# Altium PCB linkit-v4-0.3_6layers_kimonly.PcbDoc (part 4 of 5)
Units mm, origin at the board's own origin, x right, y up, seen from the top; angles counter-clockwise.
Board outline 70 x 35 mm, 6 copper layers (Top Layer, Int1 (GND), Int2 (Sign), Int3 (Sign), Int4 (PWR), Bottom Layer), stack 1.636 mm thick; 194 components, 149 nets, 738 pads, 717 vias.
Unrouted connection lines stored in the file: 1.
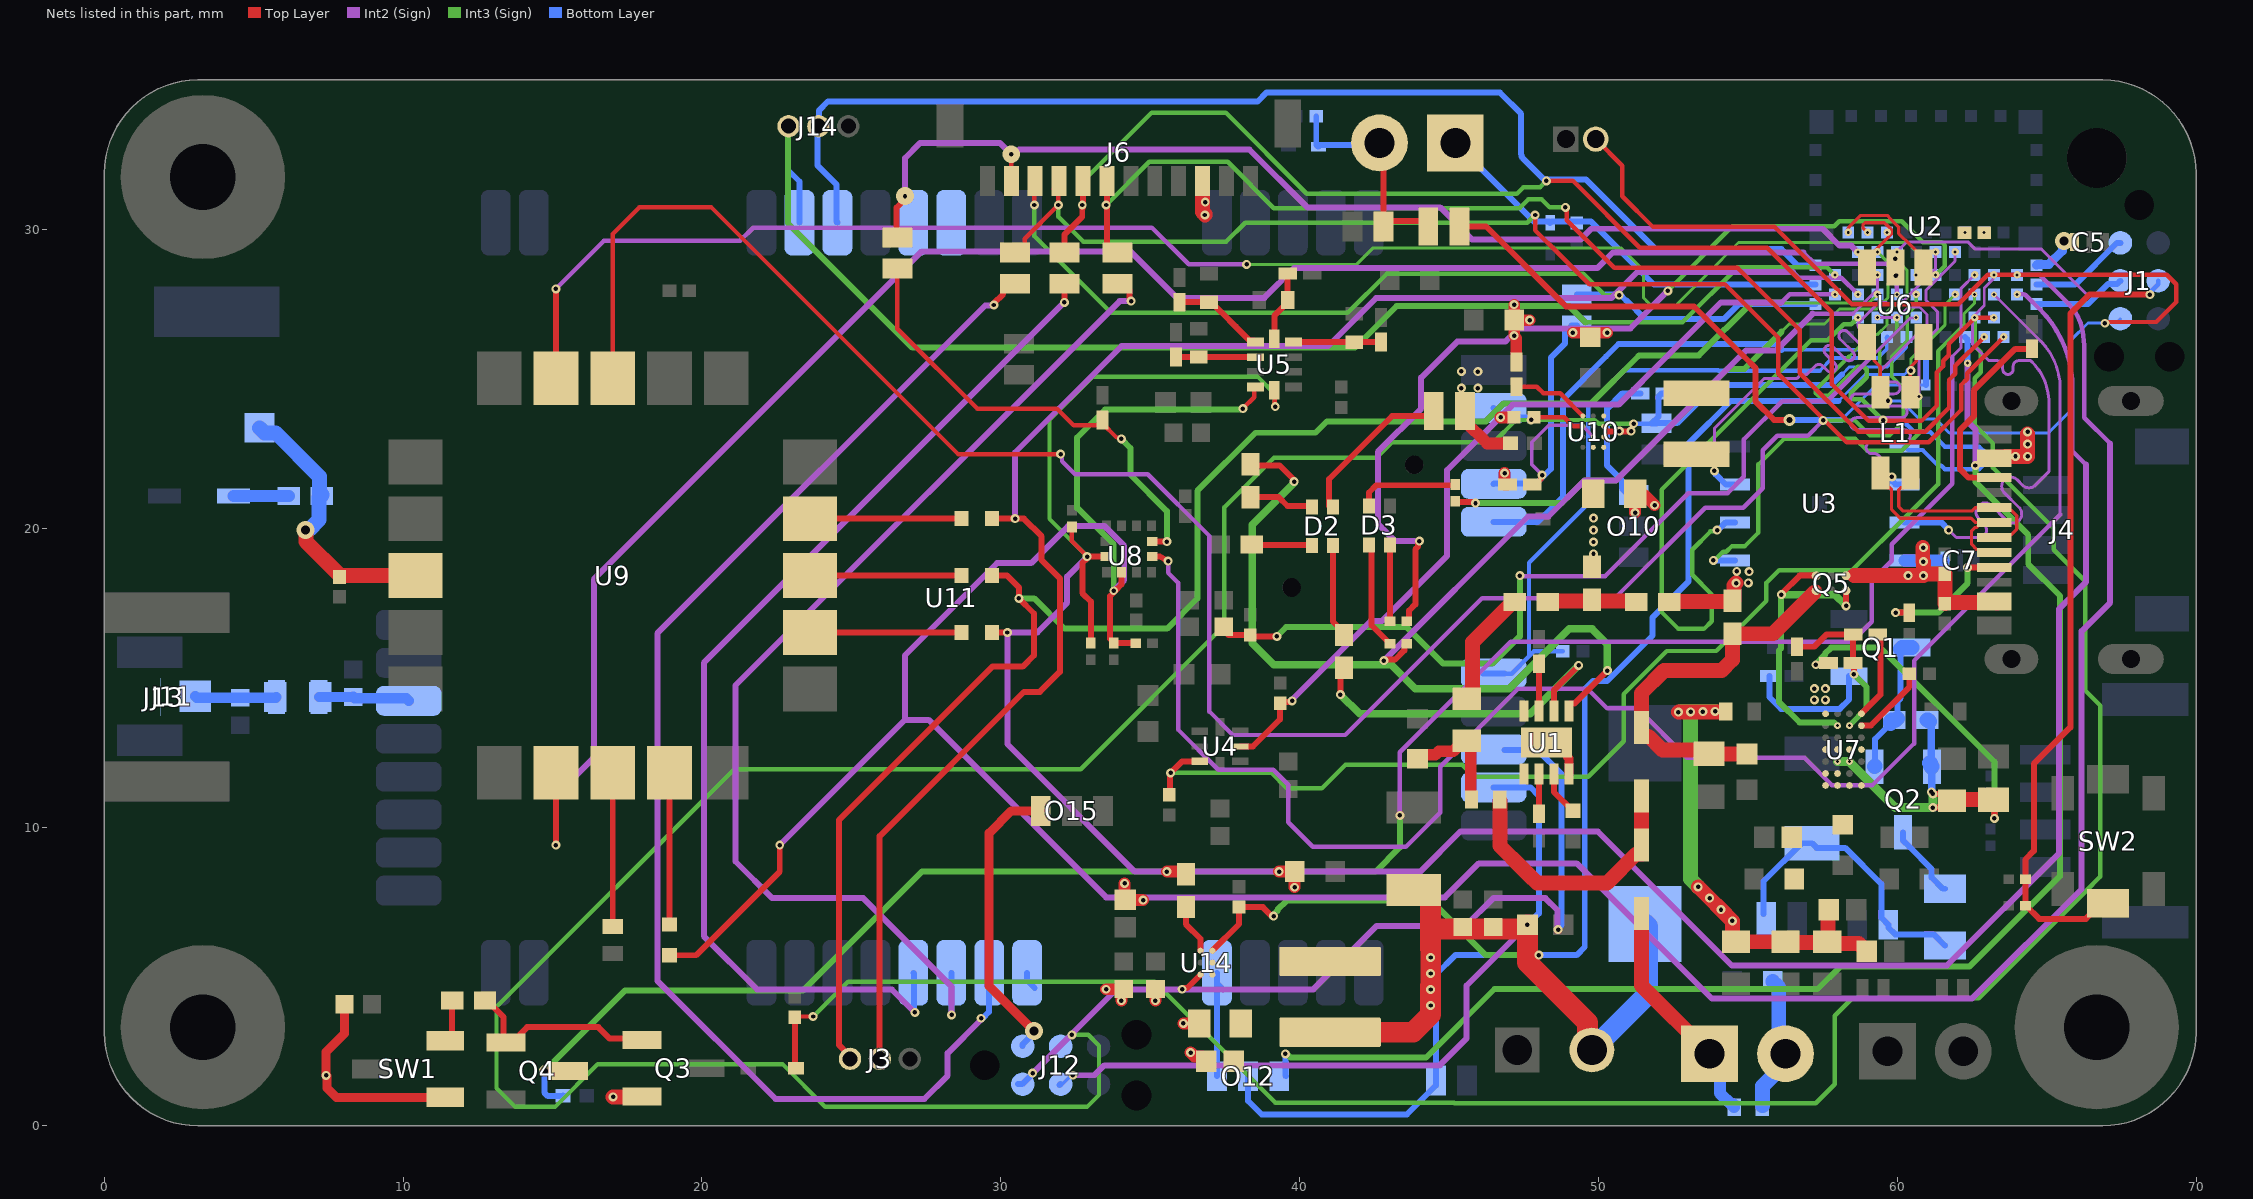
[diagram p7: the nets of this part, all layers, seen from the top]

## Via types
v1: diameter 0.3, hole 0.15, Int1 (GND) to Int3 (Sign), tented both sides, 165 vias
v2: diameter 0.3, hole 0.15, Top Layer to Int1 (GND), tented both sides, 113 vias
v3: diameter 0.3, hole 0.15, Top Layer to Int4 (PWR), tented both sides, 69 vias
v4: diameter 0.3, hole 0.15, Top Layer to Int3 (Sign), tented both sides, 64 vias
v5: diameter 0.3, hole 0.15, Int1 (GND) to Int2 (Sign), tented both sides, 39 vias
v6: diameter 0.6, hole 0.15, Int1 (GND) to Bottom Layer, tented both sides, 35 vias
v7: diameter 0.4/0.4/0.4/0.4 (per signal layer), hole 0.2, Top Layer to Bottom Layer, tented both sides, 31 vias
v8: diameter 0.3, hole 0.15, Int1 (GND) to Bottom Layer, tented both sides, 28 vias
v9: diameter 0.3, hole 0.15, Top Layer to Int2 (Sign), tented both sides, 21 vias
v10: diameter 0.3, hole 0.15, Int3 (Sign) to Bottom Layer, tented both sides, 20 vias
v11: diameter 0.3, hole 0.15, Int2 (Sign) to Int3 (Sign), tented both sides, 18 vias
v12: diameter 0.3, hole 0.15, Int4 (PWR) to Bottom Layer, tented both sides, 16 vias
v13: diameter 0.3, hole 0.15, Int2 (Sign) to Bottom Layer, tented both sides, 15 vias
v14: diameter 0.25, hole 0.1, Int3 (Sign) to Bottom Layer, tented both sides, 15 vias
v15: diameter 0.5, hole 0.2, Top Layer to Bottom Layer, tented both sides, 12 vias
v16: diameter 0.25, hole 0.1, Int2 (Sign) to Bottom Layer, tented both sides, 12 vias
v17: diameter 0.25, hole 0.1, Top Layer to Bottom Layer, tented both sides, 8 vias
v18: diameter 0.2, hole 0.1, Int2 (Sign) to Bottom Layer, tented both sides, 7 vias
v19: diameter 0.226, hole 0.1, Top Layer to Int3 (Sign), tented both sides, 6 vias
v20: diameter 0.4, hole 0.2, Top Layer to Bottom Layer, tented both sides, 6 vias
v21: diameter 0.6, hole 0.3, Top Layer to Bottom Layer, tented both sides, 4 vias
v22: diameter 0.25, hole 0.1, Int1 (GND) to Bottom Layer, tented both sides, 4 vias
v23: diameter 0.6, hole 0.15, Top Layer to Int2 (Sign), tented both sides, 2 vias
v24: diameter 0.6, hole 0.15, Int3 (Sign) to Bottom Layer, tented both sides, 2 vias
v25: diameter 0.3, hole 0.15, Top Layer to Bottom Layer, tented both sides, 2 vias
v26: diameter 0.6, hole 0.15, Int4 (PWR) to Bottom Layer, tented both sides, 1 vias
v27: diameter 0.25, hole 0.1, Int2 (Sign) to Int3 (Sign), tented both sides, 1 vias
v28: diameter 0.169, hole 0.1, Top Layer to Int2 (Sign), tented both sides, 1 vias

## Nets (pads, with @x,y where several pads share a name; then routed paths per layer and width w, separated by ;. In a path a pad name is that pad's centre, name@x,y a point inside that pad or via, vN(x,y) a via of type N, cw(c..) or ccw(c..) an arc to the next point about the centre after c; other vN are vias at no path point) (continued)
GPIO: J6.11 O16.1 U2.9 | length 37.7
  Top Layer w0.146: v23(30.353,32.512) J6.11@30.354,31.623 J6.11@30.354,31.623
  Top Layer w0.2: O16.1@26.543,29.731 26.514,29.76 26.514,30.724 26.797,31.007 v23(26.797,31.115)
  Int2 (Sign) w0.2: v23(26.797,31.115) 26.797,32.385 27.305,32.893 29.972,32.893 v23(30.353,32.512) 30.461,32.512 30.621,32.671 38.322,32.671 40.259,30.734 44.704,30.734 45.772,29.666 48.706,29.666 49.403,29.666 49.756,30.02 57.501,30.02 58.065,29.456 58.465,29.456 v16(58.681,29.24)
GPS_INT: U2.61 U9.19 | length 53.2
  Top Layer w0.2: U9.19@15.118,25.015 v9(15.118,28.01)
  Int2 (Sign) w0.15: v9(15.118,28.01) 16.724,29.617 21.279,29.617 21.716,30.055 35.062,30.055 36.287,28.829 v11(38.227,28.829)
  Int3 (Sign) w0.1: v11(38.227,28.829) 41.91,28.829 42.462,29.381 50.756,29.381 51.506,28.631 51.506,27.708 51.688,27.525 51.803,27.411 52.543,27.411 53.633,28.501 54.691,29.558 60.322,29.558 60.635,29.246 v18(60.635,28.474)
GPS_NRST: U2.53 U9.18 | length 69.5
  Top Layer w0.146: U9.18@17.018,25.015 17.018,29.845 17.907,30.734 20.32,30.734 28.575,22.479 v9(32.004,22.479)
  Int2 (Sign) w0.146: v9(32.004,22.479) 32.053,22.43 32.053,22.24 32.49,21.802 34.92,21.802 36.984,19.738 36.984,13.862 37.767,13.079 41.527,13.079 46.11,17.662 50.555,17.662 53.574,20.681 54.844,20.681 55.499,21.336 55.499,22.606 55.988,23.095 57.009,23.095 v11(57.519,23.605)
  Int3 (Sign) w0.12: v11(57.519,23.605) 57.946,23.605 58.585,23.605 59.103,23.087 59.724,23.087 60.208,23.571 60.208,24.684 59.817,25.075 59.817,25.745 59.817,25.754 60.332,26.269 60.332,27.167 60.635,27.47 v14(60.635,27.824)
GPS_PPS: U2.54 U9.7 | length 62.2
  Top Layer w0.2: v9(15.113,9.398) 15.113,11.81 U9.7@15.118,11.815
  Int2 (Sign) w0.15: 56.858,29.228 57.24,28.846 59.645,28.846 59.985,28.507 v18(59.985,27.824)
  Int2 (Sign) w0.2: v9(15.113,9.398) 15.113,11.049 16.383,12.319 16.383,18.288 27.361,29.266 34.334,29.266 35.893,27.706 38.821,27.706 39.815,28.701 48.706,28.701 49.962,28.701 50.489,29.228 56.858,29.228
GPS_PWR_EN: R21.2 U2.50 U4.7 | length 40.5
  Top Layer w0.2: R21.2@35.643,11.083 35.665,11.105 35.665,11.789 v4(35.687,11.811) 36.072,12.196 36.659,12.196 U4.7@36.663,12.2
  Int3 (Sign) w0.1: 62.235,26.798 62.235,27.175 62.585,27.525 v18(62.585,27.824)
  Int3 (Sign) w0.15: v4(35.687,11.811) 39.068,11.811 39.576,11.303 40.75,11.303 41.537,12.09 45.441,12.09 45.847,11.684 49.657,11.684 50.846,12.873 50.846,14.45 52.287,15.891 53.942,15.891 55.624,17.573 55.624,18.173 56.05,18.599 58.494,18.599 60.346,20.451 61.364,21.47 61.364,25.745 61.364,25.927 62.235,26.798
GPS_UART_RX: J3.2 R40.2 U2.56 | length 55.7
  Top Layer w0.2: J3.2@25.892,2.286 25.951,2.345 25.951,9.695 30.779,14.523 31.309,14.523 31.978,15.191 31.978,18.323 31.369,18.932 31.369,19.727 30.776,20.32 R40.2@29.713,20.32
  Int2 (Sign) w0.15: 56.515,28.575 56.708,28.382 58.127,28.382 v16(58.685,27.824)
  Int2 (Sign) w0.2: v9(30.48,20.32) 30.48,22.533 34.042,26.094 40.953,26.094 42.557,27.698 50.431,27.698 51.308,28.575 56.515,28.575
GPS_UART_TX: J3.3 R42.2 U2.55 | length 56.3
  Top Layer w0.2: J3.3@24.892,2.286 24.892,2.403 24.592,2.703 24.592,10.241 29.718,15.367 30.734,15.367 31.115,15.748 31.115,17.145 v4(30.607,17.653) 30.607,18.022 30.214,18.415 R42.2@29.713,18.415
  Int3 (Sign) w0.1: 56.139,27.543 59.055,27.543 v14(59.335,27.824)
  Int3 (Sign) w0.2: v4(30.607,17.653) 31.117,17.653 32.133,16.637 35.569,16.637 36.58,17.648 36.58,21.25 38.524,23.194 40.535,23.194 40.917,23.576 46.232,23.576 46.832,24.176 49.755,24.176 51.323,25.745 51.36,25.781 53.363,25.781 55.131,27.549 56.134,27.549
I2C_SCL: R1.1 R43.2 R54.1 U2.29 U5.10 U8.12 | length 88.8
  Top Layer w0.15: R54.1@32.385,20.04 32.385,19.558 v4(32.893,19.05) ; U8.12@33.513,19.052 U8.12@33.515,19.054 ; U5.10@39.159,24.618 39.173,24.604 39.173,24.083 v4(39.187,24.069)
  Top Layer w0.2: R43.2@29.713,16.515 29.716,16.512 30.224,16.512 v9(30.226,16.51) ; v4(32.893,19.05) 32.893,18.996 32.734,18.836 32.734,17.828 33.02,17.542 R1.1@33.02,16.155 ; v4@32.895,19.052 U8.12@33.513,19.052
  Int2 (Sign) w0.15: v16(64.01,27.824) 64.21,27.824 cw(c64.21,27.674) 64.316,27.78 64.793,27.302 ; 64.794,27.302 cw(c62.201,24.727) 65.831,25.146 cw(c62.201,24.727) 65.855,24.728 65.855,24.727 65.855,22.583 66.313,22.125
  Int2 (Sign) w0.2: v4(32.893,19.05) 32.223,18.38 32.223,17.509 31.224,16.51 v9(30.226,16.51) 30.226,12.772 34.489,8.509 44.041,8.509 45.381,9.849 49.98,9.849 54.463,5.367 61.661,5.367 65.416,9.122 65.416,17.298 66.313,18.196 66.313,22.125
  Int3 (Sign) w0.15: v4(32.893,19.05) 31.633,20.31 31.633,23.632 33.075,25.074 38.592,25.074 39.172,24.494 39.172,24.085 v4(39.187,24.069)
I2C_SDA: R2.1 R44.1 R56.1 U2.27 U5.9 U8.2 | length 109
  Top Layer w0.15: v4(38.1,24.003) 38.481,24.384 38.481,24.653 38.521,24.693 U5.9@38.521,24.728
  Top Layer w0.2: R44.1@18.918,5.71 19.807,5.71 22.606,8.509 v9(22.606,9.398) ; U8.2@34.04,18.529 34.04,18.117 33.83,17.907 v4(33.782,17.907) 33.782,17.853 33.656,17.727 33.656,16.735 33.656,16.301 33.782,16.175 R2.1@33.782,16.155 34.492,16.155 R56.1@34.518,16.129
  Int2 (Sign) w0.15: v16(64.01,28.474) 64.77,28.474 65.709,27.535 cw(c64.43,26.257) 66.238,26.257 cw(c63.719,25.933) 66.258,25.992 cw(c66.108,25.989) 66.258,25.989 66.259,25.78 66.259,25.146 66.259,23.7 67.123,22.836
  Int2 (Sign) w0.2: v9(22.606,9.398) 26.797,13.589 ; v4(33.782,17.907) 33.782,17.91 34.134,18.262 34.134,19.408 33.475,20.066 32.258,20.066 31.02,18.828 29.877,18.828 26.797,15.748 26.797,13.589 ; 67.123,22.836 67.123,17.509 66.167,16.553 66.167,12.625 66.167,7.926 62.497,4.256 53.8,4.256 49.27,8.786 45.997,8.786 44.86,7.649 33.529,7.649 27.589,13.589 26.797,13.589
  Int3 (Sign) w0.2: v4(33.782,17.907) 33.782,19.461 32.56,20.683 32.56,23.035 33.496,23.971 38.068,23.971 v4(38.1,24.003)
IMU_PWR: R18.2 R31.1 U2.41 | length 30.8
  Top Layer w0.1: R18.2@38.354,16.424 R18.2@38.395,16.383
  Top Layer w0.2: R31.1@37.465,16.695 37.41,16.64 37.627,16.424 R18.2@38.354,16.424 ; R18.2@38.395,16.383 v4(39.243,16.383)
  Int2 (Sign) w0.1: 59.149,25.745 60.444,27.039 60.625,27.039 v18(60.635,27.049)
  Int2 (Sign) w0.15: v11(47.371,18.415) 47.395,18.391 50.223,18.391 53.005,21.174 54.321,21.174 54.864,21.717 54.864,22.97 56.147,24.253 57.657,24.253 59.149,25.745
  Int3 (Sign) w0.2: v4(39.243,16.383) 39.547,16.687 43.588,16.687 44.806,15.469 46.457,15.469 47.371,16.383 v11(47.371,18.415)
INT1_IMU: U2.49 U8.5 | length 56.2
  Top Layer w0.2: U8.5@35.065,19.054 35.321,19.054 v9(35.599,18.901)
  Int2 (Sign) w0.1: v18(63.235,27.824) 64.797,26.262 cw(c63.22,24.684) 65.403,25.146 cw(c63.22,24.684) 65.451,24.684 65.451,24.682 65.451,20.458
  Int2 (Sign) w0.15: v9(35.599,18.901) 35.599,18.505 35.934,18.17 35.934,13.263 37.282,11.915 39.121,11.915 39.624,11.412 39.624,10.16 40.443,9.341 43.561,9.341 44.704,10.484 44.704,12.023 47.301,14.62 49.639,14.62 50.289,13.97 51.308,13.97 52.959,12.319 56.896,12.319 57.811,11.404 59.17,11.404 60.561,12.795 60.561,15.568 65.451,20.458
INT2_IMU: O16.2 R63.1 U8.6 | length 15.9
  Top Layer w0.15: O16.2@26.543,28.689 26.543,26.67 29.21,24.003 31.877,24.003 32.443,23.437 33.276,23.437 33.401,23.562 R63.1@33.401,23.622 33.401,23.509 33.876,23.035 33.988,23.035 v4(34.036,22.987)
  Top Layer w0.2: U8.6@35.065,19.554 v4(35.56,19.554)
  Int3 (Sign) w0.2: v4(34.036,22.987) 34.342,22.681 34.342,21.789 35.56,20.571 v4(35.56,19.554)
KIM_I2C_SCL: U11.41@28.345,30.224
KIM_I2C_SDA: U11.40@27.075,30.224
KIM_PWR_ON: O12.3 U2.36 | length 48.6
  Int2 (Sign) w0.2: v16(62.357,25.527) 62.357,23.564 62.611,23.31 v11(62.611,22.098)
  Int3 (Sign) w0.2: v10(39.522,2.413) 39.577,2.413 39.704,2.286 44.229,2.286 46.523,4.579 57.335,4.579 58.086,5.33 62.41,5.33 65.448,8.367 65.448,17.73 64.383,18.795 64.383,19.779 62.611,21.551 v11(62.611,22.098)
  Bottom Layer w0.2: v10(39.522,2.413) 39.522,1.681 O12.3@39.542,1.662 ; U2.36@62.26,26.399 62.357,26.302 v16(62.357,25.527)
KIM_RX: O4.1 U11.19@27.075,5.124 | length 36.3
  Top Layer w0.2: v9(32.131,27.559) O4.1@32.131,28.181
  Int2 (Sign) w0.2: v13(27.125,3.795) 26.356,4.564 21.852,4.564 20.066,6.35 20.066,15.494 v9(32.131,27.559)
  Bottom Layer w0.2: U11.19@27.075,5.124 27.1,5.099 27.1,3.82 v13(27.125,3.795)
KIM_TX: O3.1 U11.18@28.345,5.124 | length 36.7
  Top Layer w0.2: O3.1@33.909,28.181 34.079,28.181 34.309,27.951 34.309,27.705 34.363,27.651 v9(34.363,27.597)
  Int2 (Sign) w0.2: v13@28.359,3.718 28.359,4.661 25.4,7.62 22.352,7.62 21.126,8.846 21.126,14.741 33.982,27.597 v9(34.363,27.597)
  Bottom Layer w0.2: U11.18@28.345,5.124 28.352,5.117 28.352,3.724 v13(28.359,3.717)
LED_B: R24.1 U2.63 | length 23.2
  Top Layer w0.2: v9(42.82,15.569) 42.858,15.607 43.199,15.607 43.507,15.915 43.507,16.069 43.567,16.129 R24.1@43.587,16.129
  Int2 (Sign) w0.1: 58.516,27.178 59.335,27.997 v16(59.335,28.474)
  Int2 (Sign) w0.15: 57.17,27.178 58.516,27.178
  Int2 (Sign) w0.2: v9(42.82,15.569) 47.642,20.391 48.331,20.391 49.53,21.59 50.58,21.59 54.735,25.745 54.943,25.953 55.945,25.953 57.17,27.178
LED_G: R25.1 U2.60 | length 31.1
  Top Layer w0.2: R25.1@43.587,16.891 43.607,16.891 43.667,16.951 43.667,17.244 43.874,17.451 43.874,19.293 43.969,19.389 43.969,19.527 v9(44.008,19.565)
  Int2 (Sign) w0.2: v9(44.008,19.565) 43.203,19.565 42.622,20.146 42.622,22.556 44.069,24.003 44.069,25.036 45.276,26.243 46.885,26.243 47.026,26.384 47.026,26.388 47.327,26.689 48.706,26.689 51.073,26.689 v11(52.324,27.94)
  Int3 (Sign) w0.15: v11(52.324,27.94) 54.483,30.099 57.892,30.099 58.062,30.27 60.154,30.27 60.85,29.574 61.485,29.574 61.585,29.474 61.585,28.774 v14(61.285,28.474)
LED_R: R23.1 U2.62 | length 18.2
  Top Layer w0.2: R23.1@45.212,20.903 45.242,20.873 45.857,20.873 v4(45.887,20.842)
  Int3 (Sign) w0.1: 56.134,26.579 56.384,26.829 57.563,26.829 58.071,27.337 59.315,27.337 59.692,27.713 59.692,28.181 v14(59.985,28.474)
  Int3 (Sign) w0.2: v4(45.887,20.842) 48.782,20.842 49.539,21.599 50.59,21.599 54.325,25.334 54.889,25.334 56.134,26.579
LX1: L2.1 U10.A1
LX2: L2.2 U10.D1
NetBT1_+: BT1.+ C40.2 R41.1 U9.3 | length 9.3
  Top Layer w0.5: v21(6.731,19.939) 6.75,19.92 6.75,19.558 C40.2@7.874,18.434 ; C40.2@7.925,18.415 U9.3@10.418,18.415
  Bottom Layer w0.5: BT1.+@5.195,23.36 5.364,23.191 5.742,23.191 7.201,21.732 7.201,21.124 7.207,21.119 R41.1@7.286,21.119 ; v21(6.731,19.939) 6.75,19.958 6.867,19.958 7.191,20.282 7.191,21.024 7.241,21.074 R41.1@7.279,21.074
NetC2_2: C2.2 R53.1 U1.8 | length 4
  Top Layer w0.4: R53.1@47.127,17.526 R53.1@47.202,17.526
  Top Layer w0.5: C2.2@45.593,14.289 45.668,14.289 45.793,14.414 45.793,16.192 R53.1@47.127,17.526
NetC5_2: C5.2 U2.26 | length 1.4
  Bottom Layer w0.3: U2.26@64.66,28.799 64.685,28.824 65.071,28.824 65.529,29.282 65.529,29.546 v21(65.586,29.603)
NetC7_2: C7.2 U3.8 | length 1.4
  Bottom Layer w0.302: C7.2@61.554,18.923 C7.2@61.603,18.923
  Bottom Layer w0.4: U3.8@60.244,18.923 60.544,18.923 C7.2@61.554,18.923
NetC14_1: C14.1 R27.2 U5.4 | length 2.9
  Top Layer w0.2: U5.4@39.797,26.228 C14.1@41.829,26.228 R27.2@42.718,26.228
NetC15_1: C15.1 R30.2 U5.5 | length 2.5
  Top Layer w0.2: U5.5@39.159,26.338 39.159,27.113 39.604,27.558 C15.1@39.604,27.633 39.604,28.422 39.539,28.422 R30.2@39.639,28.522
NetC16_1: C16.1 R32.2 U5.6 | length 3.1
  Top Layer w0.2: R32.2@35.987,27.563 C16.1@36.967,27.563 37.042,27.563 37.395,27.21 37.403,27.21 37.868,26.744 38.334,26.278 38.471,26.278 U5.6@38.521,26.228
NetC23_1: C23.1 C24.2 C25.1 C28.2 C29.1 C32.2 C33.2 C43.2 U7.B3 U7.B4 | length 16.6
  Top Layer w0.4: v4(53.905,13.872) 54.252,13.872 C25.1@54.262,13.862
  Top Layer w0.5: v4(52.676,13.845) 54.187,13.845 C25.1@54.213,13.871 ; v4(53.34,8.001) v4(53.721,7.62) v4(54.102,7.239) v4(54.483,6.858) 54.483,6.447 54.517,6.413 54.517,6.159 54.519,6.161 C43.2@54.61,6.161 C24.2@56.261,6.161 C24.2@56.356,6.161 ; C24.2@56.38,6.137 C28.2@57.301,6.137 ; C28.2@57.682,6.161 57.682,7.128 57.706,7.152 C32.2@57.706,7.239 ; C28.2@57.741,6.107 58.711,6.107 58.866,5.952 58.881,5.952 58.976,5.857 C33.2@58.976,5.842
  Int3 (Sign) w0.5: v4@52.772,13.872 v4@53.104,13.872 ; v4(53.34,8.001) 53.086,8.255 v4(53.086,13.854) v4@53.104,13.872 ; v4(53.905,13.872) v4@53.104,13.872
  other v4: 53.496,13.863
NetC30_1: C30.1 C31.1 R36.1 U7.C2 U7.C3 | length 18
  Top Layer w0.2: v4(57.276,15.431) 57.295,15.45 57.653,15.45 R36.1@57.697,15.494 ; v4(61.195,10.653) 61.597,10.653 C31.1@61.86,10.916 ; v4(61.195,11.112) 61.604,11.112 C31.1@61.83,10.886 ; v4(63.246,10.287) C30.1@63.246,10.897
  Top Layer w0.5: C31.1@61.86,10.916 C30.1@63.227,10.916 C30.1@63.246,10.897
  Int3 (Sign) w0.2: v4(57.276,15.431) 57.276,15.458 57.578,15.76 57.578,15.795 57.785,16.002 59.436,16.002 63.246,12.192 v4(63.246,10.287)
  Int3 (Sign) w0.3: v19(58.001,12.192) v19(58.401,12.192) 59.94,10.653 v4(61.195,10.653) v4(61.195,11.112)
NetC49_2: C49.2 J11.3 J13.1 L3.1@5.762,14.351 L3.2@5.727,14.351 | length 2.7
  Bottom Layer w0.347: J11.3@3.049,14.377 3.1,14.326 C49.2@4.555,14.326 5.737,14.326 L3.1@5.762,14.351
NetC57_1: C57.1 R51.2 U5.7 | length 2.8
  Top Layer w0.2: R51.2@35.864,25.728 C57.1@36.626,25.728 U5.7@38.521,25.728 U5.7@38.519,25.73 ; C57.1@36.626,25.827 C57.1@36.723,25.73
NetC58_1: C58.1 D5.1 D6.1 U1.1 | length 9.1
  Top Layer w0.5: C58.1@46.703,10.872 46.703,9.374 47.462,8.615 47.462,8.61 47.813,8.259 47.818,8.259 47.949,8.128 50.292,8.128 51.269,9.105 51.435,9.105 51.435,9.271 D6.1@51.435,11.035
NetD2_1: D2.1 O9.2 | length 5.5
  Top Layer w0.2: D2.1@41.117,20.716 41.094,20.739 40.99,20.739 40.99,21.647 43.092,23.749 44.32,23.749 O9.2@44.491,23.92
NetD2_2: D2.2 R13.1 | length 2.2
  Top Layer w0.2: R13.1@38.354,21.04 39.298,21.04 39.596,20.742 40.391,20.742 D2.2@40.417,20.716
NetD2_3: D2.3 R14.2 | length 2
  Top Layer w0.2: R14.2@38.396,19.457 38.411,19.442 40.391,19.442 D2.3@40.417,19.416
NetD2_4: D2.4 R15.1 | length 3.1
  Top Layer w0.2: D2.4@41.117,19.416 41.117,16.875 41.492,16.5 R15.1@41.492,16.425
NetD3_2: D3.2 R23.2 | length 3.5
  Top Layer w0.2: D3.2@42.322,20.742 42.322,21.196 42.563,21.437 45.186,21.437 R23.2@45.212,21.463
NetD3_3: D3.3 R24.2 | length 3.6
  Top Layer w0.2: D3.3@42.322,19.442 42.409,19.355 42.409,16.747 42.947,16.209 42.947,16.189 43.007,16.129 R24.2@43.027,16.129
NetD3_4: D3.4 R25.2 | length 2.5
  Top Layer w0.2: R25.2@43.027,16.891 D3.4@43.027,19.437
NetD4_1: D4.1 R41.2 | length 1.9
  Bottom Layer w0.4: D4.1@4.323,21.074 R41.2@6.179,21.074
NetJ4_A5: J4.A5 R34.2 | length 4.7
  Top Layer w0.2: v4(59.944,17.176) R34.2@60.401,17.176 ; v4(62.357,18.691) J4.A5@63.243,18.691
  Int3 (Sign) w0.2: v4(59.944,17.176) 61.372,17.176 62.357,18.161 v4(62.357,18.691)
NetJ4_B5: J4.B5 R33.2 | length 6.6
  Top Layer w0.192: 62.517,21.691 J4.B5@62.818,21.691
  Top Layer w0.2: 62.517,21.691 62.383,21.691 62.103,21.971 62.103,23.29 62.564,23.751 62.564,24.615 63.953,26.004 R33.2@64.516,26.004 ; J4.B5@62.818,21.691 J4.B5@63.243,21.691
NetJ12_1: J12.1 O15.1 | length 10
  Top Layer w0.3: v21(31.115,3.175) 29.612,4.678 29.612,9.8 30.353,10.541 30.897,10.541 O15.1@31.344,10.541
  Bottom Layer w0.2: J12.1@30.734,2.667 30.734,2.73 31.115,3.111 v21(31.115,3.175)
NetL5_2: L5.2 U14.B1
NetO10_1: O10.1 R48.2 | length 4.7
  Bottom Layer w0.2: O10.1@51.181,21.107 51.011,21.107 50.781,21.338 50.781,21.606 50.292,22.095 50.292,24.003 50.8,24.511 R48.2@51.404,24.511
NetO12_1: O12.1 U11.15@37.235,5.124 | length 3.8
  Bottom Layer w0.1: O12.1@37.44,1.995 O12.1@37.44,2.011
  Bottom Layer w0.2: O12.1@37.235,1.662 U11.15@37.235,4.771 ; U11.15@37.235,5.124 U11.15@37.235,4.771 ; U11.15@37.44,4.567 U11.15@37.235,4.771
NetQ1_1: Q1.1 R3.1 | length 4.4
  Bottom Layer w0.2: R3.1@55.722,15.047 55.722,14.351 56.117,13.956 58.08,13.956 58.386,14.262 Q1.1@58.386,15.047
NetQ1_3: Q1.3 Q2.1 R4.2 | length 4.8
  Bottom Layer w0.2: Q2.1@59.254,12.038 59.254,12.941 R4.2@59.777,13.464 ; R4.2@60.013,13.639 60.013,14.213 60.111,14.311 Q1.3@60.111,15.952
  Bottom Layer w0.5: Q2.1@59.238,12.022 Q2.1@59.254,12.038 ; R4.2@59.777,13.464 59.777,13.539 59.827,13.589 R4.2@59.902,13.589 59.963,13.589 R4.2@60.013,13.639 ; Q1.3@60.111,15.952 60.161,16.002 Q1.3@60.486,16.002
NetQ2_3: Q2.3 R5.1 | length 2.5
  Bottom Layer w0.2: Q2.3@60.198,9.822 60.198,9.547 60.398,9.347 61.152,8.593 61.152,8.31 61.527,7.935 R5.1@61.595,7.935
NetQ3_1: Q3.1 Q4.1 R49.1 | length 6.8
  Top Layer w0.2: R49.1@12.742,4.191 12.817,4.191 13.37,3.638 13.37,2.86 Q4.1@13.441,2.79 13.648,2.79 14.142,3.284 14.142,3.302 16.537,3.302 16.918,2.921 17.807,2.921 Q3.1@18,2.728
NetQ5_A2: Q5.A2 Q5.C1 U7.F3 | length 10.2
  Top Layer w0.2: v4(56.126,17.777) 56.126,17.804 56.733,18.411 Q5.C1@57.285,18.411 ; v4(58.285,17.399) Q5.A2@58.285,17.911
  Int3 (Sign) w0.2: v4(56.126,17.777) 56.111,17.762 56.111,15.976 56.049,15.914 56.049,14.182 56.733,13.498 57.888,13.498 57.994,13.392 v19(58.001,13.392)
  Int3 (Sign) w0.254: v4(56.126,17.777) 57.907,17.777 v4(58.285,17.399)
NetR10_2: R10.2 U1.3 | length 1.5
  Top Layer w0.2: U1.3@48.51,11.777 48.51,11.172 49.137,10.546 R10.2@49.149,10.546
NetR11_2: R11.2 U1.2 | length 1.3
  Top Layer w0.2: R11.2@48.01,10.445 U1.2@48.01,11.777
NetR12_2: R12.2 U1.7 | length 1.6
  Top Layer w0.2: R12.2@48.006,15.463 48.008,15.461 48.008,13.879 U1.7@48.01,13.877
NetR17_1: R17.1 U2.20
  other v17: 62.26,29.899
NetR17_2: R17.2 U2.22
  other v17: 62.91,29.899
NetR36_2: R36.2 R38.1 R39.1 U7.F2 | length 5.5
  Top Layer w0.2: R39.1@56.642,16.033 57.223,16.033 57.63,16.44 R38.1@58.525,16.44 R36.2@58.525,15.498 ; R36.2@58.521,15.494 58.547,15.468 v4(58.547,15.113)
  Int3 (Sign) w0.2: v19(58.401,13.392) 58.401,13.399 58.971,13.969 58.971,14.689 v4(58.547,15.113)
NetR37_1: R37.1 U7.F1 | length 2.6
  Top Layer w0.2: U7.F1@58.801,13.392 58.806,13.397 59.117,13.397 60.401,14.681 R37.1@60.401,15.132
NetR38_2: R38.2 U7.G1 | length 2.9
  Top Layer w0.2: U7.G1@58.801,13.792 59.436,14.427 59.436,16.353 R38.2@59.349,16.44
NetR40_1: R40.1 U9.14 | length 5.1
  Top Layer w0.2: U9.14@23.618,20.315 23.623,20.32 R40.1@28.688,20.32
NetR42_1: R42.1 U9.13 | length 5.1
  Top Layer w0.2: U9.13@23.618,18.415 R42.1@28.688,18.415
NetR43_1: R43.1 U9.12 | length 5.1
  Top Layer w0.2: U9.12@23.618,16.515 R43.1@28.688,16.515
NetR44_2: R44.2 U9.9 | length 5.1
  Top Layer w0.2: R44.2@18.918,6.736 U9.9@18.918,11.815
NetR45_1: R45.1 U10.B2 | length 4.2
  Top Layer w0.2: R45.1@47.783,21.463 47.896,21.463 48.079,21.647 48.079,21.741 v9(48.118,21.78)
  Int2 (Sign) w0.1: 49.439,23.446 v28(49.828,23.057)
  Int2 (Sign) w0.12: v9(48.118,21.78) 47.768,22.129 47.768,22.876 48.338,23.446 49.439,23.446
NetR46_1: R46.1 U10.C3 | length 1.7
  Top Layer w0.15: R46.1@47.85,23.709 48.857,23.709 49.162,23.404 U10.C3@49.471,23.404
NetR47_2: R47.2 U10.D3 | length 2.6
  Top Layer w0.15: R47.2@47.266,24.737 47.938,24.737 48.162,24.513 48.36,24.513 48.362,24.511 48.724,24.511 U10.D3@49.478,23.757
NetR49_2: R49.2 SW1.2 | length 1.4
  Top Layer w0.2: SW1.2@11.41,2.855 11.417,2.855 11.642,3.08 R49.2@11.642,4.191
NetR50_1: R50.1 U14.C2 | length 1.7
  Top Layer w0.2: R50.1@36.195,7.324 36.195,6.751 36.684,6.262 U14.C2@36.684,5.861
NetR52_1: R52.1 R53.2 R55.1 | length 3
  Top Layer w0.4: R53.2@48.302,17.526 R53.2@48.344,17.569 ; R55.1@49.741,17.569 R55.1@49.784,17.611 R55.1@49.827,17.569 ; R52.1@51.224,17.569 R52.1@51.266,17.526
  Top Layer w0.5: R53.2@48.344,17.569 R55.1@49.741,17.569 ; R55.1@49.827,17.569 R52.1@51.224,17.569
NPG_LED: R15.2 U1.6 | length 11.7
  Top Layer w0.2: v4(41.365,14.434) 41.365,15.198 R15.2@41.492,15.325 ; U1.6@48.51,13.877 48.51,14.581 v4(49.336,15.407)
  Int3 (Sign) w0.254: v4(41.365,14.434) 42.013,13.785 47.715,13.785 v4(49.336,15.407)
nRESET: C6.2 J1.3 R16.1 SW2.2 U2.13 | length 36.4
  Top Layer w0.2: C6.2@64.288,7.366 R16.1@64.288,8.255 64.288,8.916 64.573,9.201 64.573,12.122 65.789,13.338 65.789,27.177 66.425,27.813 v25(68.453,27.813) ; C6.2@64.308,7.366 64.746,6.928 66.309,6.928 66.831,7.45 SW2.2@67.056,7.45
  Int2 (Sign) w0.1: v16(59.985,29.249) 60.309,29.573 62.375,29.573 62.611,29.337 64.827,29.337 66.351,27.813 v25(68.453,27.813)
  Bottom Layer w0.15: v25(68.453,27.813) 68.453,27.881 68.736,28.164 J1.3@68.736,28.276
nRESET-SAT: J12.3 O11.2 R48.1 U2.42 U11.2@46.495,24.024 | length 89.5
  Int3 (Sign) w0.146: v10(32.385,3.048) 32.928,3.048 33.291,2.685 33.291,1.038 32.888,0.635 24.13,0.635 22.697,2.068 16.52,2.068 15.086,0.635 13.753,0.635 13.13,1.259 13.13,3.986 21.082,11.938 32.675,11.938 37.483,16.745 37.483,17.841 37.483,20.696 39.146,22.36 42.578,22.36 43.092,22.874 46.496,22.874 47.244,23.622 v10(47.752,23.622) 49.883,23.622 50.01,23.495 v10(51.181,23.495)
  Bottom Layer w0.1: 58.149,25.146 58.402,25.399 59.669,25.399 60.31,26.04 U2.42@60.31,26.399
  Bottom Layer w0.146: J12.3@32.004,2.667 v10(32.385,3.048) ; v10(51.181,23.495) O11.2@51.773,23.495
  Bottom Layer w0.2: U11.2@46.495,24.024 46.813,23.706 47.599,23.706 47.683,23.622 v10(47.752,23.622) ; R48.1@52.228,24.511 52.115,24.511 52.015,24.411 52.015,23.738 51.785,23.508 51.773,23.508 O11.2@51.943,23.508 51.951,23.516 52.632,23.516 53.913,24.797 57.8,24.797 58.149,25.146
NRF_DBG: J1.6 J2.2 U2.43 | length 40.5
  Top Layer w0.146: J2.2@49.911,33.02 50.8,32.131 50.8,31.11 51.828,30.082 55.897,30.082 58.485,27.494 62.038,27.494 63.025,28.481 69.019,28.481 69.335,28.166 69.335,27.567 68.667,26.9 66.988,26.9 v25(66.947,26.858)
  Int3 (Sign) w0.12: v10(59.69,24.257) 59.412,24.535 59.412,26.002 59.985,26.575 v14(59.985,27.049)
  Bottom Layer w0.1: v10(59.69,24.257) 60.112,24.257 60.328,24.041 60.347,24.041 60.729,23.66 61.268,23.66 61.742,23.185 65.051,23.185 65.786,23.92 65.786,26.275 66.38,26.87 66.935,26.87 v25(66.947,26.858) 67.004,26.916 67.375,26.916 J1.6@67.466,27.006
PGND1: C41.2 C42.2 FB4.1 R45.2 R46.2 R47.1 U10.B1 U10.C1 | length 6.9
  Top Layer w0.1: U10.B1@50.178,23.057 50.341,23.22 ; U10.C1@50.178,23.407 50.215,23.407 50.341,23.282
  Top Layer w0.2: 50.341,23.243 v2@51.097,23.243
  Top Layer w0.385: FB4.1@47.179,26.87 47.179,26.443 47.259,26.364 47.259,25.569 R47.1@47.266,25.561 ; FB4.1@47.179,27.06 v2(47.179,27.482) ; FB4.1@47.274,26.965 v2(47.697,26.965) ; v2(49.149,26.543) v2(50.292,26.543)
  Top Layer w0.4: v2(46.728,23.709) R46.2@47.17,23.709 ; v2(46.863,21.844) 46.863,21.463 R45.2@46.959,21.463 ; v2(51.23,20.518) C41.2@51.23,21.153 51.265,21.118 51.532,21.118 v2(51.882,20.768)
  other v2: 50.702,23.246 51.097,23.246 47.179,26.447
PGND2: C51.2 C52.1 C53.1 C54.1 C55.1 FB3.1 R50.2 U14.A2 | length 6.8
  Top Layer w0.2: v2(36.068,4.572) 36.106,4.61 36.233,4.61 U14.A2@36.684,5.061
  Top Layer w0.4: v2(33.528,4.572) 34.036,4.572 v2(34.036,4.191) ; C53.1@34.163,7.572 34.146,7.589 v2(34.146,8.117) 34.146,7.553 v2(34.768,7.553) ; v2(35.179,4.191) C54.1@35.179,4.612 ; v2(35.56,8.509) 36.11,8.509 R50.2@36.195,8.424 ; v2(36.114,3.429) C51.2@36.638,3.429 ; v2(36.354,2.455) 36.49,2.319 36.733,2.319 36.878,2.174 C52.1@36.878,2.159 ; v2(39.314,8.509) FB3.1@39.838,8.509 v2(39.838,7.985)
PGND3: FB2.1 U7.A1 U7.A2 U7.A3 U7.A4
PGND4: C2.1 C58.2 FB6.1 U1.4 U1.9 | length 5.5
  Top Layer w0.3: U1.9@48.26,12.827 48.61,12.827 48.96,12.477 48.96,12.351 49.01,12.301 U1.4@49.01,11.777
  Top Layer w0.385: FB6.1@43.942,12.279 44.075,12.412 44.543,12.412 44.663,12.532 45.141,12.532 45.498,12.889 C2.1@45.593,12.889 45.72,12.762 45.72,10.955 C58.2@45.753,10.922
POWER_CONTROL: D1.2 R58.2 U2.35 | length 72.7
  Top Layer w0.15: R58.2@23.114,3.638 23.136,3.661 v4(23.727,3.661)
  Top Layer w0.2: R58.2@23.114,3.628 23.114,1.968 D1.2@23.152,1.93 D1.2@23.207,1.93
  Int3 (Sign) w0.15: v4(23.727,3.661) 24.892,4.826 35.146,4.826 39.194,0.778 45.168,0.778 45.184,0.762 57.277,0.762 57.912,1.397 57.912,3.688 58.495,4.271 62.722,4.271 66.288,7.838 66.793,8.342 66.793,14.064 66.288,14.569 66.288,18.221 65.232,19.277 65.232,19.992 63.201,22.023 63.201,22.839 62.589,23.451 62.589,25.013 62.799,25.222 62.799,25.894 62.585,26.107 v14(62.585,27.049)
QSPI_CLK: U2.45 U3.6 | length 17.6
  Int2 (Sign) w0.1: v18(59.335,27.049) 60.023,27.049 60.376,27.401 60.742,27.401 60.992,27.152 60.992,26.821 59.915,25.745 59.436,25.265 59.436,25.146 59.436,25.096 ccw(c59.636,25.096) 59.636,24.896 59.898,24.896 cw(c59.898,24.696) 59.898,24.496 58.636,24.496 ccw(c58.636,24.296) 58.636,24.096 60.129,24.096 cw(c60.129,23.896) 60.129,23.696 58.636,23.696 ccw(c58.636,23.496) 58.636,23.296 60.236,23.296 cw(c60.236,23.096) 60.236,22.896 59.158,22.896 ccw(c59.158,22.696) 59.158,22.496 59.236,22.496 cw(c59.236,22.296) 59.436,22.296 59.436,22.098 59.568,21.966 v13(59.817,21.717)
  Bottom Layer w0.2: v13(59.817,21.717) 59.844,21.69 59.844,21.563 59.944,21.463 U3.6@60.244,21.463
QSPI_CS: U2.19 U3.1 | length 18
  Int2 (Sign) w0.1: v27(60.722,24.405) 60.722,26.046 61.346,26.67 61.346,27.247 60.954,27.639 60.954,27.953 61.935,28.933 v16(61.935,29.249)
  Int3 (Sign) w0.15: v13(53.848,18.923) 53.882,18.923 54.17,19.211 54.279,19.211 54.47,19.401 54.902,19.401 55.356,19.855 55.356,22.134 56.209,22.987 58.599,22.987 59.002,22.584 60.129,22.584 60.761,23.216 60.761,24.366 v27(60.722,24.405)
  Bottom Layer w0.2: v13(53.848,18.923) U3.1@54.564,18.923
QSPI_IO0: U2.11 U3.5 | length 18.9
  Int3 (Sign) w0.1: 58.384,25.745 59.115,26.476 59.327,26.476 59.653,26.802 59.653,27.239 59.879,27.465 60.101,27.465 60.32,27.684 60.32,28.638 60.021,28.937 59.647,28.937 v14(59.335,29.249)
  Int3 (Sign) w0.15: 58.384,25.745 57.28,24.641 57.28,24.517 57.368,24.429 57.703,24.429 58.674,25.4 58.875,25.4 58.976,25.299 58.976,25.054 58.449,24.527 58.449,24.403 58.537,24.315 58.812,24.315 v10@59.513,23.614
  Bottom Layer w0.15: v10(59.524,23.614) 60.171,23.614 60.552,23.233 61.091,23.233 61.591,22.733 62.738,22.733 62.963,22.508 62.963,22.196 62.738,21.971 61.595,21.971 61.468,22.098 61.364,22.098 60.846,22.616 60.361,22.616 U3.5@60.244,22.733
QSPI_IO1: U2.47 U3.2 | length 19.5
  Int3 (Sign) w0.15: v13(53.975,19.939) 53.927,19.891 53.749,19.891 53.137,19.279 53.137,18.438 53.794,17.781 53.794,16.89 53.531,16.627 52.679,16.627 52.113,17.194 52.113,21.287 56.57,25.745 57.114,26.289 57.673,26.289 58.206,26.822 58.458,26.822 v14(58.685,27.049)
  Bottom Layer w0.2: v13(53.975,19.939) 54.01,19.939 54.264,20.193 U3.2@54.564,20.193
QSPI_IO2: U2.17 U3.3 | length 17.5
  Int2 (Sign) w0.1: v13(53.884,21.917) 53.884,23.346 55.543,25.005 56.633,25.005 56.774,25.146 56.973,25.146 57.255,25.429 cw(c57.379,25.305) 57.503,25.429 57.662,25.27 ccw(c57.786,25.393) 57.91,25.27 ccw(c57.786,25.393) 57.91,25.517 57.604,25.823 cw(c57.727,25.947) 57.604,26.071 cw(c57.727,25.947) 57.851,26.071 58.269,25.653 ccw(c58.393,25.776) 58.517,25.653 ccw(c58.393,25.776) 58.517,25.9 58.099,26.318 cw(c58.222,26.442) 58.099,26.566 cw(c58.222,26.442) 58.346,26.566 58.764,26.148 ccw(c58.888,26.271) 59.012,26.148 ccw(c58.888,26.271) 59.012,26.395 58.74,26.666 cw(c58.864,26.79) 58.74,26.914 ; v16(61.285,29.249) 61.285,28.686 60.09,27.492 59.701,27.492 59.644,27.549 59.375,27.549 ; 58.74,26.914 59.306,27.48 ; 58.74,26.914 59.306,27.48 ; 59.306,27.48 59.306,27.49 59.365,27.549 59.375,27.549 ; 59.306,27.48 59.341,27.514 59.375,27.549
  Bottom Layer w0.2: v13(53.884,21.917) 53.922,21.879 53.922,21.805 54.264,21.463 U3.3@54.564,21.463
QSPI_IO3: U2.57 U3.7 | length 18.5
  Int2 (Sign) w0.1: v13(61.722,19.939) 61.976,19.685 62.865,19.685 62.9,19.72 ccw(c62.685,19.935) 62.9,20.15 62.723,20.327 cw(c62.938,20.542) 62.723,20.757 cw(c62.938,20.542) 63.153,20.757 63.647,20.263 ccw(c63.862,20.478) 64.077,20.263 ccw(c63.862,20.478) 64.077,20.693 63.583,21.187 cw(c63.798,21.402) 63.583,21.617 cw(c63.798,21.402) 64.013,21.617 64.19,21.44 ccw(c64.405,21.655) 64.62,21.44 65.072,21.892 65.072,24.302 ccw(c63.173,24.211) 64.829,25.146 ccw(c63.173,24.211) 64.605,25.461 64.463,25.604 64.104,25.604 64.054,25.604 ccw(c64.054,25.429) 63.879,25.429 63.879,25.321 cw(c63.704,25.321) 63.704,25.146 cw(c63.704,25.321) 63.529,25.321 63.529,25.429 ccw(c63.354,25.429) 63.354,25.604 63.066,25.604 62.891,25.779 62.515,26.155 62.515,27.053 62.911,27.448 62.911,28.034 63.206,28.33 63.206,28.445 v16(63.235,28.474)
  Bottom Layer w0.2: U3.7@60.244,20.193 61.468,20.193 v13(61.722,19.939)
REED_MCU: Q4.3 R7.2 U2.58 | length 67.7
  Top Layer w0.2: v20(14.744,1.845) 15.536,1.845 Q4.3@15.541,1.84
  Int2 (Sign) w0.1: 61.841,25.745 62.141,26.044 62.141,28.029 v16(62.585,28.474)
  Int2 (Sign) w0.15: v11(43.355,10.394) 43.354,10.395 43.354,12.499 47.06,16.205 58.485,16.205 59.146,16.866 59.146,18.234 59.819,18.908 59.819,19.465 61.841,21.487 61.841,25.745
  Int3 (Sign) w0.2: v20(14.744,1.845) 17.425,4.526 23.377,4.526 27.36,8.509 42.545,8.509 43.355,9.319 v11(43.355,10.394)
  Bottom Layer w0.2: v20@14.73,1.831 14.73,1.111 14.848,0.994 15.326,0.994 R7.2@15.348,1.016
RX-OUT: C26.1 C27.1 D6.2 Q5.C2 R35.2 U7.D1 U7.D2 U7.D3 U7.D4 | length 13
  Top Layer w0.4: Q5.C2@57.222,17.848 Q5.C2@57.285,17.911
  Top Layer w0.5: C27.1@54.972,12.446 54.969,12.449 53.705,12.449 53.701,12.453 53.582,12.572 52.144,12.572 51.681,13.035 51.435,13.035 D6.2@51.435,13.335 51.435,14.478 52.197,15.24 54.126,15.24 54.483,15.597 R35.2@54.483,16.468 54.687,16.468 55.842,16.468 Q5.C2@57.222,17.848
SAFE: R26.2 U9.8 | length 5.1
  Top Layer w0.2: R26.2@17.018,6.673 U9.8@17.018,11.815
SAT_ANTENNA: C47.2 L3.1@7.227,14.351 L3.2@7.192,14.351 U11.31@10.195,14.224 | length 3.1
  Bottom Layer w0.347: L3.2@7.192,14.351 8.327,14.351 C47.2@8.332,14.357 8.375,14.314 10.105,14.314 U11.31@10.195,14.224
SAT_EN: O12.2 O14.2 R20.2 U2.51 U14.C1 | length 60
  Top Layer w0.2: U14.C1@37.084,5.861 37.973,6.75 R20.2@37.973,7.321 38.773,7.321 39.075,7.019 v4(39.129,7.019)
  Int3 (Sign) w0.1: v10(60.452,25.273) 60.452,25.66 61.604,26.811 61.604,27.478 61.935,27.81 v14(61.935,27.824)
  Int3 (Sign) w0.2: v4(39.129,7.019) 39.129,7.074 39.254,7.199 39.254,7.227 39.566,7.539 44.404,7.539 46.228,5.715 v10(48.006,5.715)
  Bottom Layer w0.1: 58.032,24.257 58.918,25.143 60.243,25.143 v10@60.373,25.273
  Bottom Layer w0.2: O12.2@38.276,1.662 38.276,0.84 38.735,0.381 43.591,0.381 44.564,1.354 O14.2@44.564,1.524 44.564,5.067 45.212,5.715 v10(48.006,5.715) 49.271,5.715 49.543,5.987 49.543,14.61 49.815,14.883 50.289,14.883 51.816,16.41 51.816,17.018 53.019,18.221 53.019,22.838 54.438,24.257 58.032,24.257 ; v10@60.373,25.273 v10(60.452,25.273)
SAT_INT: U2.46 U11.5@46.495,20.214 | length 17.3
  Bottom Layer w0.12: 56.134,25.968 58.924,25.968 59.01,26.054 U2.46@59.01,26.399
  Bottom Layer w0.2: U11.5@46.495,20.214 46.501,20.208 47.966,20.208 48.82,21.062 48.82,24.309 50.256,25.745 50.673,26.162 55.94,26.162 56.134,25.968
SAT_SPI_NSS: O1.1 U11.4@46.495,21.484 | length 7.4
  Bottom Layer w0.2: U11.4@46.505,21.494 47.919,21.494 48.407,21.982 48.407,25.708 48.706,26.008 48.876,26.178 48.876,26.554 49.106,26.784 O1.1@49.276,26.784
SAT_SPI_SCK: O2.1 U11.17@29.615,5.124 | length 44.3
  Top Layer w0.2: v9(29.772,27.469) 29.772,27.523 30.08,27.831 30.08,27.951 30.31,28.181 O2.1@30.48,28.181
  Int2 (Sign) w0.2: v13(29.341,3.602) 29.341,3.548 28.226,2.433 28.226,1.683 27.443,0.9 22.468,0.9 18.513,4.855 18.513,16.481 29.483,27.451 29.754,27.451 v9(29.772,27.469)
  Bottom Layer w0.2: v13(29.341,3.602) 29.393,3.602 29.603,3.812 29.603,5.112 U11.17@29.615,5.124
SAT_SWCLK: J12.4 U11.9@46.495,11.324 | length 25
  Int2 (Sign) w0.2: v13(32.414,1.695) 33.135,1.695 33.468,2.027 44.692,2.027 45.593,2.928 45.593,4.699 v13(47.625,6.731)
  Bottom Layer w0.1: J12.4@32.004,1.397 32.06,1.397 32.358,1.695 v13(32.414,1.695)
  Bottom Layer w0.2: J12.4@31.969,1.362 J12.4@32.004,1.397 ; U11.9@46.495,11.324 47.731,11.324 48.006,11.049 48.006,7.112 v13(47.625,6.731)
SAT_SWDIO: J12.2 U11.8@46.495,12.594 | length 29
  Int2 (Sign) w0.2: v13(31.07,1.767) 33.875,4.572 40.461,4.572 42.581,6.691 45.553,6.691 46.482,7.62 48.221,7.62 48.631,7.211 48.631,6.542 v13(48.655,6.566)
  Bottom Layer w0.2: J12.2@30.575,1.397 30.717,1.397 31.07,1.75 v13(31.07,1.767) ; U11.8@46.863,12.573 47.97,12.573 48.768,11.775 48.768,6.733 48.655,6.62 v13(48.655,6.566)
SAT_UART_RX: J14.2 U2.6 U11.38@24.535,30.224 | length 40.9
  Bottom Layer w0.2: U11.38@24.535,30.224 24.5,30.259 24.5,31.507 23.876,32.131 23.876,33.427 23.922,33.473 23.922,33.984 24.215,34.277 38.595,34.277 38.889,34.571 46.709,34.571 47.416,33.864 47.416,32.516 ccw(c47.616,32.517) 47.474,32.376 48.175,31.675 48.706,31.675 49.578,31.675 51.916,29.337 56.12,29.337 56.659,28.799 U2.6@57.26,28.799
SAT_UART_TX: J14.3 U2.5 U11.37@23.265,30.224 | length 45.1
  Int3 (Sign) w0.15: 49.565,26.889 52.814,26.889 54.661,28.736 57.648,28.736 v14(57.91,28.474)
  Int3 (Sign) w0.2: J14.3@22.901,33.451 22.876,33.427 22.876,30.21 27.044,26.042 41.855,26.042 43.245,27.432 49.022,27.432 49.565,26.889
  Bottom Layer w0.2: J14.3@22.901,33.451 22.876,33.427 22.876,31.988 23.265,31.599 U11.37@23.265,30.224
SAT_WKUP: R19.2 U2.44 U11.6@46.495,15.134 | length 23.7
  Bottom Layer w0.12: 57.404,25.273 57.826,25.695 59.346,25.695 59.642,25.99 U2.44@59.642,26.38
  Bottom Layer w0.15: U11.6@46.855,15.134 47.095,15.134 47.677,15.716 ; R19.2@48.809,15.875 47.836,15.875 47.677,15.716 ; 57.404,25.273 54.014,25.273 54.001,25.286 50.862,25.286 49.657,24.081 49.657,20.828 47.677,18.848 47.677,15.716 ; U2.44@59.642,26.38 U2.44@59.66,26.399
  Bottom Layer w0.2: U11.6@46.855,15.134 46.675,15.134 U11.6@46.495,15.134 ; U11.6@46.495,15.134 46.134,15.134 U11.6@46.495,15.134
SLOW_SWS_SEND: D7.1 J10.1 R59.1 U2.4 | length 14
  Bottom Layer w0.146: 47.836,30.269 ccw(c47.94,30.372) 47.852,30.255
  Bottom Layer w0.2: J10.1@45.212,32.893 47.836,30.269 ; 47.852,30.255 48.35,30.255 D7.1@48.387,30.218 48.424,30.255 48.706,30.255 49.755,30.255 51.861,28.149 U2.4@57.26,28.149
SPI_CLK: J6.9 O2.2 U2.32 | length 42.3
  Top Layer w0.15: O2.2@30.48,29.223 30.548,29.223 30.803,29.478 30.803,29.69 v4(31.928,30.815) J6.9@31.928,31.493 ; J6.9@31.779,31.344 J6.9@31.928,31.493 ; v4(47.879,30.48) 47.879,29.972 48.706,29.145 49.688,28.163 54.233,28.163 56.017,26.379 56.017,25.745 56.017,25.166 58.303,22.88 61.058,22.88 62.135,23.957 62.135,24.792 62.346,25.004 62.346,25.185 v17(63.56,26.399) ; J6.9@31.928,31.493 31.954,31.519 J6.9@31.954,31.623 31.928,31.597 J6.9@31.928,31.493
  Int3 (Sign) w0.15: v4(31.928,30.815) 31.928,30.429 32.766,29.591 37.545,29.591 38.18,30.226 47.619,30.226 47.873,30.48 v4(47.879,30.48)
SPI_MISO: J6.8 O4.2 U2.33 | length 43.4
  Top Layer w0.15: v4(48.26,31.623) 49.149,31.623 51.384,29.388 55.649,29.388 57.813,27.224 57.813,24.824 59.048,23.589 60.81,23.589 61.327,24.105 61.327,25.213 61.538,25.424 61.538,25.598 61.722,25.782 61.722,26.162 62.609,27.049 v17(63.235,27.049)
  Top Layer w0.2: O4.2@32.131,29.223 32.131,29.825 32.728,30.422 v4(32.728,30.815) ; v4@32.754,30.724 J6.8@32.754,31.623
  Int3 (Sign) w0.15: v4(32.728,30.815) 32.728,31.585 35.052,33.909 37.529,33.909 40.242,31.195 47.275,31.195 47.493,31.413 48.047,31.413 48.257,31.623 v4(48.26,31.623)
SPI_MOSI: J6.7 O3.2 U2.34 | length 39.7
  Top Layer w0.15: v4(48.895,30.734) 48.938,30.691 48.938,30.309 50.527,28.72 54.656,28.72 56.742,26.634 56.742,25.745 56.742,25.189 58.702,23.229 60.933,23.229 61.731,24.027 61.731,24.96 61.942,25.171 61.942,25.431 v17(62.91,26.399)
  Top Layer w0.2: J6.7@33.554,31.623 33.554,30.815 33.554,29.453 33.784,29.223 O3.2@33.909,29.223
  Int3 (Sign) w0.15: v4(33.528,30.815) 34.97,32.257 37.593,32.257 39.139,30.711 47.362,30.711 47.66,31.009 48.098,31.009 48.373,30.734 v4(48.895,30.734)
SPI_NSS: J6.10 O1.2 U2.2 | length 31.9
  Top Layer w0.15: v4(31.128,30.815) 31.128,31.597 J6.10@31.154,31.623
  Int3 (Sign) w0.15: v4(31.128,30.815) 31.128,29.765 32.634,28.259 33.688,27.205 41.613,27.205 42.925,28.517 49.5,28.517 50.22,27.797 v10(50.694,27.797)
  Bottom Layer w0.2: O1.2@49.276,27.826 50.72,27.826 50.924,27.621 50.946,27.621 51.572,26.995 54.192,26.995 54.696,27.499 U2.2@57.26,27.499
SPV+: C56.1 D5.2 J15.1 | length 7.8
  Top Layer w0.5: D5.2@51.435,7.105 51.435,4.699 J15.1@53.721,2.413
  Bottom Layer w0.4: J15.1@53.721,2.413 54.067,2.067 54.067,1.097 54.439,0.725 54.514,0.725 54.539,0.7 C56.1@54.539,0.625
SPV-: C56.2 FB5.1 J15.2 | length 4.6
  Bottom Layer w0.5: C56.2@55.489,0.675 55.489,1.33 56.261,2.101 J15.2@56.261,2.413 56.035,2.639 56.035,4.624 55.96,4.699 FB5.1@55.833,4.826
STAT_LED: R13.2 U1.5 | length 24.1
  Top Layer w0.2: R13.2@38.354,22.14 38.396,22.098 39.335,22.098 39.819,21.613 v4(39.819,21.559) ; U1.5@49.01,13.877 49.01,14.077 49.06,14.127 49.193,14.127 v4(50.298,15.232)
  Int3 (Sign) w0.254: v4(39.819,21.559) 39.819,21.523 38.413,20.116 38.413,16.151 39.139,15.425 43.075,15.425 43.868,14.632 47.017,14.632 49.022,16.637 49.784,16.637 50.298,16.123 v4(50.298,15.232)
SWDCLK: J1.4 U2.30 | length 3.1
  Bottom Layer w0.2: U2.30@64.66,27.499 66.383,27.499 67.048,28.164 67.354,28.164 J1.4@67.466,28.276
SWDIO: J1.2 U2.28 | length 3.4
  Bottom Layer w0.2: U2.28@64.66,28.149 65.953,28.149 67.351,29.546 J1.2@67.466,29.546
SWS: C3.2 O6.2 U2.40 | length 21
  Top Layer w0.2: O6.2@45.352,30.099 46.241,30.099 48.706,27.634 48.92,27.419 53.198,27.419 54.872,25.745 55.254,25.363 55.254,24.248 55.88,23.622 v20(56.388,23.622)
  Bottom Layer w0.1: 58.13,23.622 59.297,24.789 60.39,24.789 60.392,24.791 C3.2@60.96,24.791
  Bottom Layer w0.2: v20@56.416,23.622 58.13,23.622 ; C3.2@60.96,24.791 U2.40@60.96,26.399
SWS_IN: D8.1 J10.2 O6.1 O8.1 R60.1 | length 7.7
  Top Layer w0.2: J10.2@42.672,32.893 42.812,32.753 O8.1@42.812,30.281 ; O8.1@42.812,30.099 O8.1@42.812,30.243 ; O6.1@44.31,30.099 44.128,30.281 O8.1@42.812,30.281 ; O8.1@42.812,30.243 O8.1@42.812,30.281 ; O8.1@42.812,30.243 42.773,30.281 O8.1@42.812,30.281
  Bottom Layer w0.2: R60.1@40.558,33.782 40.558,32.826 40.618,32.766 D8.1@40.632,32.766 40.692,32.826 42.605,32.826 J10.2@42.672,32.893
USB_D_N: U2.10 U6.6 | length 3
  Top Layer w0.112: U6.6@58.985,28.728 59.229,28.972 59.229,29.273 59.794,29.838 59.794,29.996 59.691,30.099 ; v17(59.01,29.899) 58.851,30.058 58.851,30.15 58.927,30.226 59.563,30.226 59.69,30.099
USB_D_P: U2.8 U6.4 | length 3.9
  Top Layer w0.112: v17(58.36,29.899) 58.36,30.047 58.777,30.465 59.662,30.465 59.789,30.338 60.054,30.073 60.054,29.859 60.427,29.486 60.885,29.028 U6.4@60.885,28.728
USB_L_N: L1.3 U6.1 | length 1.9
  Top Layer w0.112: U6.1@58.985,26.228 59.229,25.984 59.229,25.745 59.229,25.607 59.436,25.4 L1.3@59.436,24.548
USB_L_P: L1.2 U6.3 | length 1.9
  Top Layer w0.112: L1.2@60.436,24.871 60.436,25.384 60.641,25.589 60.641,25.745 60.641,25.984 U6.3@60.885,26.228
  Top Layer w0.146: L1.2@60.436,24.548 60.452,24.564 L1.2@60.452,24.871
USB_N: J4.A7 J4.B7 L1.4 | length 6.7
  Top Layer w0.112: L1.4@59.436,21.848 59.436,21.598 59.68,21.354 59.744,21.354 59.809,21.288 59.809,20.625 59.988,20.447 60.099,20.335 62.468,20.335 62.612,20.191 62.76,20.191 J4.A7@63.243,20.191 ; J4.A7@62.76,20.135 62.76,20.133 62.724,20.097 62.722,20.097 62.648,20.023 62.593,20.023 62.486,19.916 62.486,19.466 62.667,19.285 63.149,19.285 J4.B7@63.243,19.191
USB_P: J4.A6 J4.B6 L1.1 | length 7.4
  Top Layer w0.112: L1.1@60.436,21.848 60.436,21.598 60.192,21.354 60.113,21.354 60.048,21.288 60.048,20.724 60.198,20.574 62.495,20.574 62.612,20.691 J4.B6@63.243,20.691 ; 62.605,20.684 J4.B6@63.236,20.684 ; J4.A6@63.243,19.691 63.337,19.785 63.819,19.785 64,19.966 64,20.416 63.819,20.597 63.337,20.597 J4.B6@63.25,20.684
USR_IO2: U11.16@30.885,5.124 | length 0.6
  Bottom Layer w0.2: U11.16@30.885,5.124 30.885,4.87 30.894,4.861 U11.16@31.139,4.616
VADC_EN: R57.2 U2.3 U4.2 | length 28.2
  Top Layer w0.2: U4.2@38.013,12.7 38.441,12.7 39.347,13.606 39.347,14.133 39.4,14.186 39.713,14.186 v9(39.751,14.224)
  Int2 (Sign) w0.15: 56.134,27.559 56.399,27.824 v16(57.91,27.824)
  Int2 (Sign) w0.2: v9(39.751,14.224) 39.751,14.268 42.374,16.891 42.755,16.891 44.941,19.077 44.941,21.949 47.129,24.137 50.68,24.137 52.288,25.745 54.102,27.559 56.134,27.559
VBAT: C1.1 C19.2 C20.1 C21.1 C22.1 C41.1 C50.1 C51.1 C52.2 J5.2 J6.3 L5.1 O9.1 Q2.2 Q3.2 R4.1 R9.2 R55.2 SW1.1 U10.A2 U14.A1 | length 35.6
  Top Layer w0.3: C1.1@8.049,4.064 8.049,3.096 7.43,2.477 7.43,1.714 v3(7.43,1.687) 7.449,1.668 7.449,1.275 7.769,0.955 SW1.1@11.41,0.955
  Top Layer w0.4: O9.1@45.533,23.583 46.279,22.837 R9.2@47.064,22.837
  Top Layer w0.5: v3(17.031,0.971) Q3.2@17.968,0.971 ; J6.3@36.754,31.623 36.754,30.583 36.83,30.507 v3(36.83,30.48)
  Top Layer w0.7: L5.1@41.021,3.133 43.791,3.133 44.372,3.714 44.372,3.722 44.382,3.731 44.382,4.69 44.388,4.697 44.388,5.917 44.382,5.924 44.382,6.593 ; C19.2@43.815,7.891 44.19,7.891 44.375,7.706 44.375,7.296 44.375,6.593 ; 44.524,6.593 45.466,6.593 46.482,6.593 47.487,6.593 C22.1@47.625,6.731 47.625,5.461 49.631,3.455 49.631,2.693 J5.2@49.784,2.54
  Bottom Layer w0.25: R4.1@61.002,13.589 61.137,13.454 Q2.2@61.137,12.043 ; v12(61.144,11.174) 61.151,11.181 Q2.2@61.151,12
  Bottom Layer w0.5: R4.1@61.002,13.589 61.027,13.589 R4.1@61.077,13.539 ; Q2.2@61.077,12.144 61.108,12.144 61.108,12.043 Q2.2@61.151,12 ; Q2.2@61.137,12.043 Q2.2@61.158,12.022
  Bottom Layer w0.7: J5.2@49.634,2.39 51.646,4.402 51.646,6.67 C50.1@51.562,6.754
  other v3: 44.383,4.029 44.385,4.564 44.387,5.099 44.388,5.635 49.835,19.137 49.835,19.538 49.835,19.939 49.835,20.34 45.413,24.684 45.965,24.684 45.417,25.248 45.965,25.236 36.844,30.909
VBAT_SENSE: O5.1 O7.1 R5.2 R6.1 | length 9.8
  Bottom Layer w0.2: O5.1@55.526,7.088 55.526,8.184 56.8,9.458 R6.1@57.15,9.458 57.302,9.306 58.258,9.306 59.472,8.092 59.472,6.961 O7.1@59.703,6.731 59.703,6.64 59.933,6.41 61.22,6.41 R5.2@61.595,6.035
VBUS: C17.2 C18.2 J4.A4_B9 J4.B4_A9 Q5.A1 R35.1 R52.2 U2.12 U6.5 U7.G4 | length 11.5
  Top Layer w0.4: v2(59.936,29.017) 59.936,28.964 U6.5@59.944,28.956 ; J4.A4_B9@63.21,17.508 J4.A4_B9@63.243,17.541
  Top Layer w0.5: R52.2@52.366,17.526 52.387,17.547 R35.1@54.462,17.547 ; R35.1@54.483,17.568 R35.1@54.462,17.547 ; v3(54.61,18.161) 54.533,18.084 54.533,17.618 R35.1@54.462,17.547 ; 58.547,18.412 58.55,18.415 v3(60.364,18.415) ; v3@60.365,18.416 v3(60.871,18.415) ; v3@60.852,19.353 60.852,18.884 v3(60.871,18.884) v3@60.871,18.443 ; v3(60.871,18.415) 60.922,18.466 C18.2@61.595,18.466 C17.2@61.595,17.475 ; C17.2@61.628,17.508 J4.A4_B9@63.21,17.508 ; J4.B4_A9@63.273,22.311 63.352,22.391 63.601,22.391 63.615,22.405 v3(64.365,22.405) v3@64.365,23.155 ; J4.A4_B9@63.279,17.555 J4.A4_B9@63.342,17.491
  other v2: 59.944,28.448
  other v3: 57.224,14.258 57.595,14.258 57.224,14.629 57.595,14.629 55.015,18.171 54.629,18.554 55.04,18.548 60.871,19.353 63.957,22.405 64.365,22.814 64.365,23.222
  other v22: 59.66,29.899